# EAGLE board Board (EAGLE 9.7.0)
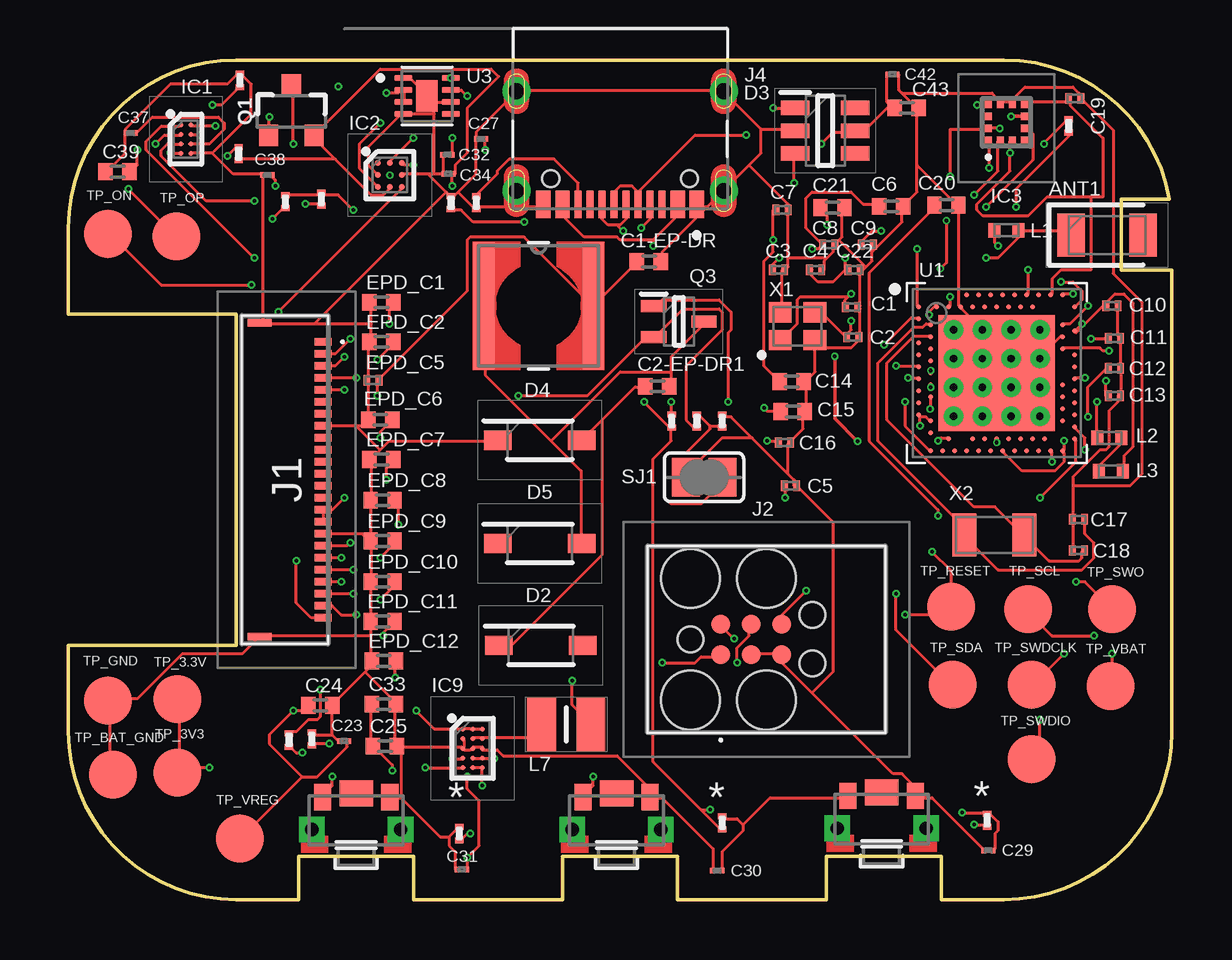
[diagram p0: board, top side]
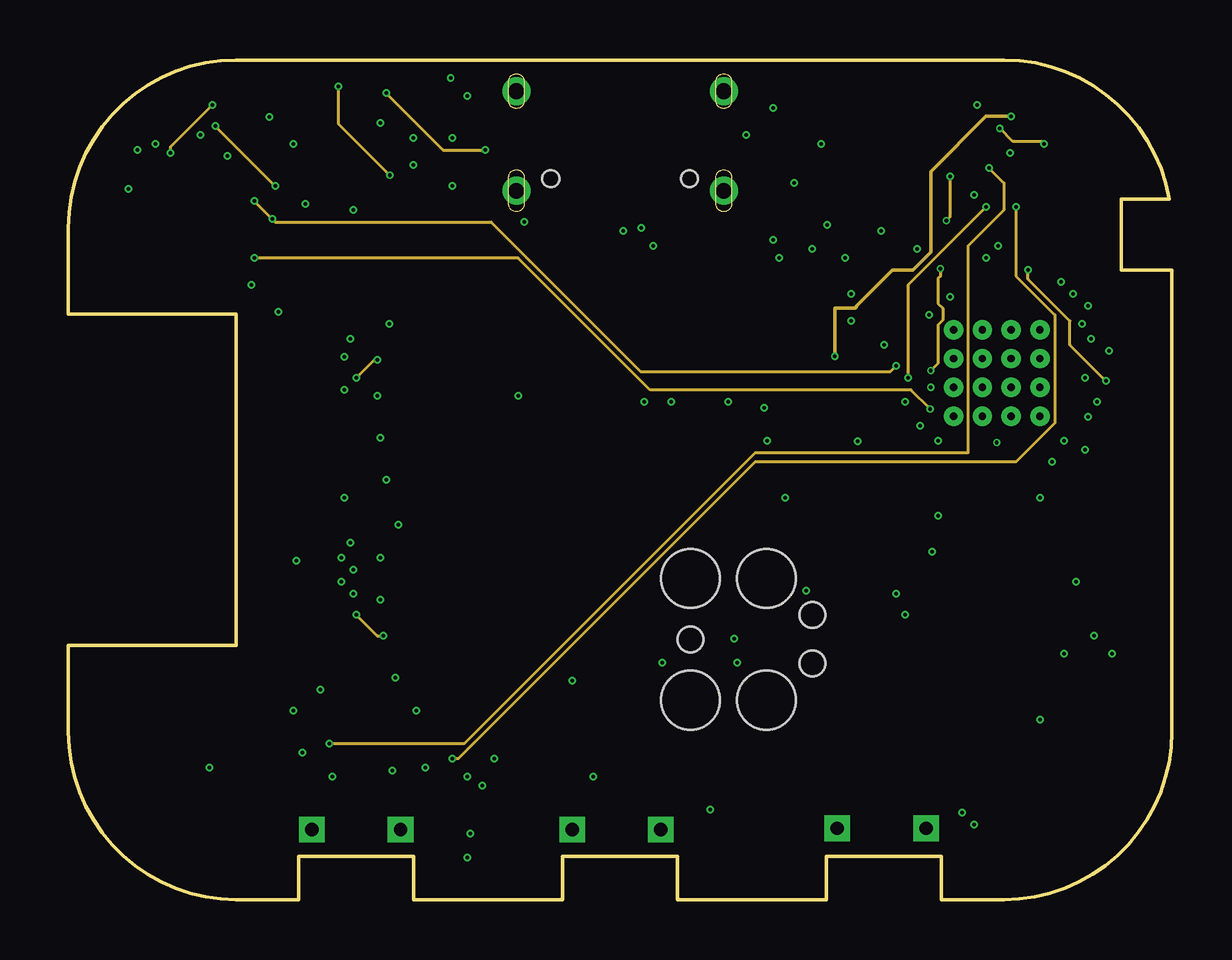
[diagram p1: board, inner layer Route2]
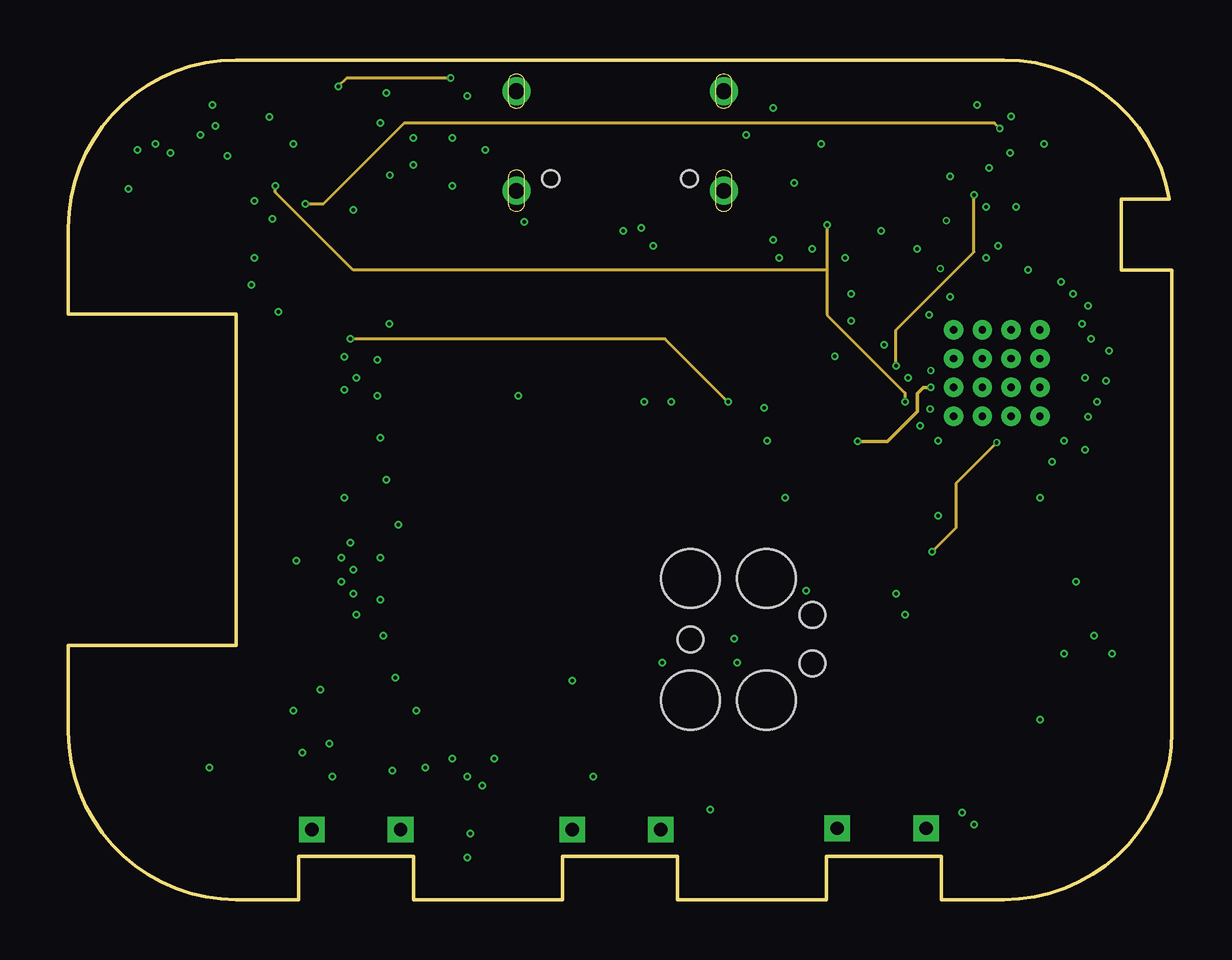
[diagram p2: board, inner layer Route15]
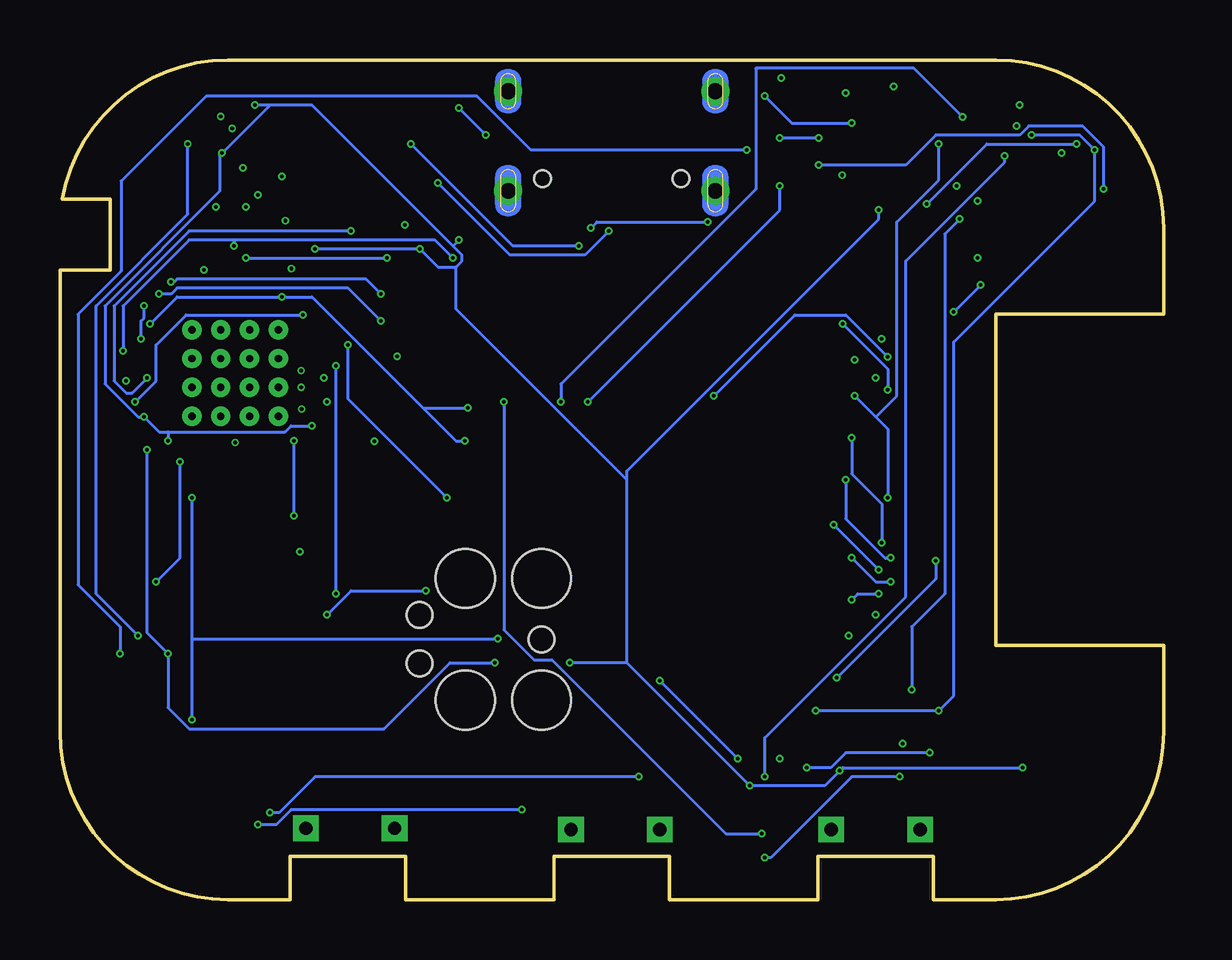
[diagram p3: board, bottom side, seen from below]

Size 46 x 35 mm. Coordinates in mm from the lower left corner, seen from the top.
Outline: 39,0 36.4,0 36.4,1.8 31.6,1.8 31.6,0 25.4,0 25.4,1.8 20.6,1.8 20.6,0 14.4,0 14.4,1.8 9.6,1.8 9.6,0 7,0 arc-90 0,7 0,10.6 7,10.6 7,24.4 0,24.4 0,28 arc-90 7,35 39,35 arc-80 45.9,29.2 43.9,29.2 43.9,26.25 46,26.25 46,7 arc-90 39,0
Copper layers (1+2*15+16): Top 0.035mm / dielectric 1.6mm / Route2 0.035mm / dielectric 0.15mm / Route15 0.035mm / dielectric 0.2mm / Bottom 0.035mm
Design rules "jlcpcb-2layers.dru *": minimum track width 5mil, minimum drill 0.15mm, track to track 5mil, track to pad 5mil, pad to pad 5mil, via to via 5mil, smd to smd 5mil, copper to edge 0.2mm, drill to drill 6mil, minimum pad ring 10mil, minimum via ring 3mil, stop-mask expansion 4mil, vias tented up to drill 999mm, thermal gap 10mil

## Footprints (pad centres in the part's own frame; a part is rotated, then mirrored left to right if it is on the bottom)
2450AT18B100E_ANTC3216X140N = smd 1.15 x 1.8: 1 -1.5,0; 2 1.5,0
NORDIC_NRF_3_RESC0201_L = smd 0.28 x 0.43: 1 -0.255,0; 2 0.255,0
PERFECT_0402_0402 = smd 0.6 x 0.7: 1 -0.5,0; 2 0.5,0
GRM011R60J152KE01L_2_CAPC0201X13N = smd 0.22 x 0.23: 1 -0.185,0; 2 0.185,0
ESP32_C6_LIBRARY_5_SOD3716X135N = smd 1.15 x 0.8: 1 -1.75,0; 2 1.75,0
ESP32_C6_LIBRARY_3_SOT95P280X145-6N = smd 1.2 x 0.6: 1 -1.25,0.95; 2 -1.25,0; 3 -1.25,-0.95; 4 1.25,-0.95; 5 1.25,0; 6 1.25,0.95
BQ25180YBGR_BGA8C40P2X4_100X155X50 = smd 0.2 x 0.2: A1 -0.2,0.6; A2 0.2,0.6; B1 -0.2,0.2; B2 0.2,0.2; C1 -0.2,-0.2; C2 0.2,-0.2; D1 -0.2,-0.6; D2 0.2,-0.6
DRV2605YZFR_BGA9C50P3X3_144X144X62 = smd 0.25 x 0.25: A1 -0.5,0.5; A2 0,0.5; A3 0.5,0.5; B1 -0.5,0; B2 0,0; B3 0.5,0; C1 -0.5,-0.5; C2 0,-0.5; C3 0.5,-0.5
BMA423_BMA423 = smd 0.3 x 0.35: 1 -0.75,-0.775; 2 -0.25,-0.775; 3 0.25,-0.775; 4 0.75,-0.775; 7 0.75,0.775; 8 0.25,0.775; 9 -0.25,0.775; 10 -0.75,0.775 | smd 0.35 x 0.3: 5 0.775,-0.25; 6 0.775,0.25; 11 -0.775,0.25; 12 -0.775,-0.25
RT6160AWSC_BGA15C40P3X5_140X230X60 = smd 0.216 x 0.216: A1 -0.4,0.8; A2 0,0.8; A3 0.4,0.8; B1 -0.4,0.4; B2 0,0.4; B3 0.4,0.4; C1 -0.4,0; C2 0,0; C3 0.4,0; D1 -0.4,-0.4; D2 0,-0.4; D3 0.4,-0.4; E1 -0.4,-0.8; E2 0,-0.8; E3 0.4,-0.8
503480-2400_5034802400 = smd 0.3 x 0.7: 1 -5.75,1.525; 2 -5.25,1.525; 3 -4.75,1.525; 4 -4.25,1.525; 5 -3.75,1.525; 6 -3.25,1.525; 7 -2.75,1.525; 8 -2.25,1.525; 9 -1.75,1.525; 10 -1.25,1.525; 11 -0.75,1.525; 12 -0.25,1.525; 13 0.25,1.525; 14 0.75,1.525; 15 1.25,1.525; 16 1.75,1.525; 17 2.25,1.525; 18 2.75,1.525; 19 3.25,1.525; 20 3.75,1.525; 21 4.25,1.525; 22 4.75,1.525; 23 5.25,1.525; 24 5.75,1.525 | smd 0.3 x 1: MP1 -6.54,-1.125; MP2 6.54,-1.125
TC2030-IDC_TC2030IDC = smd 0.783 x 0.783: 1 -0.953,-0.635; 2 -0.953,0.635; 3 0.317,-0.635; 4 0.317,0.635; 5 1.588,-0.635; 6 1.588,0.635 | hole 2.451: -2.223,-2.54; -2.223,2.54; 0.952,-2.54; 0.952,2.54 | hole 1.067: -2.223,0; 2.857,-1.016; 2.857,1.016
KH-TYPE-C-16P_KINGHELM_KH-TYPE-C-16P = smd 0.6 x 1.15: A1_B12 -3.2,4.725; A4_B9 -2.4,4.725; A9_B4 2.4,4.725; A12_B1 3.2,4.725 | smd 0.3 x 1.15: A5 -1.25,4.725; A6 -0.25,4.725; A7 0.25,4.725; A8 1.25,4.725; B5 1.75,4.725; B6 0.75,4.725; B7 -0.75,4.725; B8 -1.75,4.725 | drill 0.65 pad 1.05: SH1 -4.32,0; SH2 4.32,0; SH3 -4.32,4.15; SH4 4.32,4.15 | hole 0.7: -2.89,3.65; 2.89,3.65
NORDIC_NRF_2_RESC0402_L = smd 0.5 x 0.6: 1 -0.5,0; 2 0.5,0
ESP32_C6_LIBRARY_2_IND_4828-WE-TPC_WRE = smd 0.9 x 5.3: 1 -2.286,0; 2 2.286,0
MLP2016SR47MT0S1_INDC2016X100N = smd 1.2 x 2.2: 1 -1.028,0; 2 1.028,0
ESP32_C6_LIBRARY_4_ESP32_C6_LIBRARY_4_ESP32_C6_LIBRARY_4_ESP32_C6_LIBRARY_4_ESP32_WROVER_SPARKFUN-DISCRETESEMI_SOT23-3 = smd 0.8 x 0.9: 1 -0.95,-1; 2 0.95,-1; 3 0,1.1
ESP32_C6_LIBRARY_6_SOT65P210X110-3N = smd 1.05 x 0.5: 1 -1.05,0.65; 2 -1.05,-0.65; 3 1.05,0
CPF0201D7K68C1_0201 = smd 0.35 x 0.25: 1 0,0.275; 2 0,-0.275
ESP32_C6_LIBRARY_7_JUMPER_SJ = smd 1.168 x 1.6: 1 -0.762,0; 2 0.762,0
2025-10-22_07-23-44_LIBRARY_SW_EVP-AKE31A_PAN = smd 0.711 x 1.092: 1 -1.4,-0.972; 2 1.4,-0.972 | drill 0.559 pad 0.914 square: 3 -1.848,0.381; 4 1.848,0.381 | smd 1.397 x 1.092: 5 0,-1.124
HECTOR_WATCH_1_TP20R = smd 2 x 2: TP 0,0
NORDIC_NRF_4_AQFN50P700X700X85_HS-74N = smd 4.85 x 4.85: P$74 0,0 | drill 0.3 pad 0.6: P$75 -1.8,1.8; P$76 -0.6,1.8; P$77 0.6,1.8; P$78 1.8,1.8; P$79 -1.8,0.6; P$80 -0.6,0.6; P$81 0.6,0.6; P$82 1.8,0.6; P$83 -1.8,-0.6; P$84 -0.6,-0.6; P$85 0.6,-0.6; P$86 1.8,-0.6; P$87 -1.8,-1.8; P$88 -0.6,-1.8; P$89 0.6,-1.8; P$90 1.8,-1.8 | smd 0.2 x 0.2: P$A8 -1.25,3.25; P$A10 -0.75,3.25; P$A12 -0.25,3.25; P$A14 0.25,3.25; P$A16 0.75,3.25; P$A18 1.25,3.25; P$A20 1.75,3.25; P$A22 2.25,3.25; P$A23 2.75,3.25; P$AA24 3.25,-2.25; P$AB2 -2.75,-2.5; P$AC5 -2,-2.75; P$AC9 -1,-2.75; P$AC11 -0.5,-2.75; P$AC13 0,-2.75; P$AC15 0.5,-2.75; P$AC17 1,-2.75; P$AC19 1.5,-2.75; P$AC21 2,-2.75; P$AC24 3.25,-2.75; P$AD2 -2.75,-3.25; P$AD4 -2.25,-3.25; P$AD6 -1.75,-3.25; P$AD8 -1.25,-3.25; P$AD10 -0.75,-3.25; P$AD12 -0.25,-3.25; P$AD14 0.25,-3.25; P$AD16 0.75,-3.25; P$AD18 1.25,-3.25; P$AD20 1.75,-3.25; P$AD22 2.25,-3.25; P$AD23 2.75,-3.25; P$B1 -3.25,2.75; P$B3 -2.5,2.75; P$B5 -2,2.75; P$B7 -1.5,2.75; P$B9 -1,2.75; P$B11 -0.5,2.75; P$B13 0,2.75; P$B15 0.5,2.75; P$B17 1,2.75; P$B19 1.5,2.75; P$B24 3.25,2.75; P$C1 -3.25,2.25; P$D2 -2.75,2; P$D23 2.75,2; P$E24 3.25,1.75; P$F2 -2.75,1.5; P$F23 2.75,1.5; P$G1 -3.25,1.25; P$H2 -2.75,1; P$H23 2.75,1; P$J1 -3.25,0.75; P$J24 3.25,0.75; P$K2 -2.75,0.5; P$L1 -3.25,0.25; P$L24 3.25,0.25; P$M2 -2.75,0; P$N1 -3.25,-0.25; P$N24 3.25,-0.25; P$P2 -2.75,-0.5; P$P23 2.75,-0.5; P$R1 -3.25,-0.75; P$R24 3.25,-0.75; P$T2 -2.75,-1; P$T23 2.75,-1; P$U1 -3.25,-1.25; P$U24 3.25,-1.25; P$V23 2.75,-1.5; P$W1 -3.25,-1.75; P$W24 3.25,-1.75; P$Y2 -2.75,-2; P$Y23 2.75,-2
ESP32_C6_LIBRARY_SON50P200X200X80-9N = smd 0.76 x 0.27: 1 -0.985,0.75; 2 -0.985,0.25; 3 -0.985,-0.25; 4 -0.985,-0.75; 5 0.985,-0.75; 6 0.985,-0.25; 7 0.985,0.25; 8 0.985,0.75 | smd 0.9 x 1.3: 9 0,0
NORDIC_NRF_BT-XTAL_2016_N = smd 0.95 x 0.85: 1 -0.725,-0.575; 2 0.725,-0.575; 3 0.725,0.575; 4 -0.725,0.575
NORDIC_NRF_1_XTAL_3215_N = smd 1 x 1.8: 1 -1.25,0; 2 1.25,0

## Placement (x,y rotation side)
ANT1  2450AT18B100E  [2450AT18B100E_ANTC3216X140N]  43.3,27.7 0 top
C1  12pF  [NORDIC_NRF_3_RESC0201_L]  32.65,24.7 0 top
C1-EP-DR  10uF  [PERFECT_0402_0402]  24.2,26.6 0 top
C2  12pF  [NORDIC_NRF_3_RESC0201_L]  32.7,23.45 0 top
C2-EP-DR1  4.7uF/25V  [PERFECT_0402_0402]  24.55,21.4 0 top
C3  1pF  [NORDIC_NRF_3_RESC0201_L]  29.6,26.25 0 top
C4  1pF  [NORDIC_NRF_3_RESC0201_L]  31.15,26.25 0 top
C5  100nF  [NORDIC_NRF_3_RESC0201_L]  30.1,17.25 0 top
C6  4.7µF  [PERFECT_0402_0402]  34.3,28.9 0 top
C7  100nF  [NORDIC_NRF_3_RESC0201_L]  29.75,28.75 0 top
C8  100nF  [NORDIC_NRF_3_RESC0201_L]  31.7,27.3 0 top
C9  820pF  [NORDIC_NRF_3_RESC0201_L]  33.3,27.3 0 top
C10  N.C.  [NORDIC_NRF_3_RESC0201_L]  43.5,24.75 0 top
C11  100pF  [NORDIC_NRF_3_RESC0201_L]  43.6,23.4 0 top
C12  100nF  [NORDIC_NRF_3_RESC0201_L]  43.6,22.15 0 top
C13  N.C.  [NORDIC_NRF_3_RESC0201_L]  43.6,21 0 top
C14  4.7uF  [PERFECT_0402_0402]  30.15,21.6 0 top
C15  1.0µF  [PERFECT_0402_0402]  30.2,20.35 0 top
C16  47nF  [NORDIC_NRF_3_RESC0201_L]  29.85,19.05 0 top
C17  12pF  [NORDIC_NRF_3_RESC0201_L]  42.1,15.85 0 top
C18  12pF  [NORDIC_NRF_3_RESC0201_L]  42.1,14.55 0 top
C19  100nF  [NORDIC_NRF_3_RESC0201_L]  41.95,33.4 0 top
C20  4.7µF  [PERFECT_0402_0402]  36.6,28.95 0 top
C21  4.7µF  [PERFECT_0402_0402]  31.85,28.85 0 top
C22  N.C.  [NORDIC_NRF_3_RESC0201_L]  32.75,26.25 0 top
C23  0.1uF  [GRM011R60J152KE01L_2_CAPC0201X13N]  11.5,6.6 0 top
C24  10uF  [PERFECT_0402_0402]  10.5,8.1 0 top
C25  22uF  [PERFECT_0402_0402]  13.2,6.4 0 top
C27  0.1uF  [GRM011R60J152KE01L_2_CAPC0201X13N]  17.2,31.7 0 top
C29  1uF  [GRM011R60J152KE01L_2_CAPC0201X13N]  38.35,2.05 0 top
C30  1uF  [GRM011R60J152KE01L_2_CAPC0201X13N]  27.05,1.2 0 top
C31  1uF  [GRM011R60J152KE01L_2_CAPC0201X13N]  16.4,1.25 0 top
C32  1uF  [GRM011R60J152KE01L_2_CAPC0201X13N]  15.8,31.05 0 top
C33  22uF  [PERFECT_0402_0402]  13.15,8.15 0 top
C34  0.1uF  [GRM011R60J152KE01L_2_CAPC0201X13N]  15.85,30.25 0 top
C37  1uF  [GRM011R60J152KE01L_2_CAPC0201X13N]  2.6,31.95 0 top
C38  1uF  [GRM011R60J152KE01L_2_CAPC0201X13N]  8.3,30.2 0 top
C39  10uF  [PERFECT_0402_0402]  2.05,30.35 0 top
C42  0.1uF  [GRM011R60J152KE01L_2_CAPC0201X13N]  34.35,34.4 0 top
C43  4.7uF  [PERFECT_0402_0402]  34.95,33 0 top
D2  MBR0530  [ESP32_C6_LIBRARY_5_SOD3716X135N]  19.7,10.6 0 top
D3  USBLC6-2SC6Y  [ESP32_C6_LIBRARY_3_SOT95P280X145-6N]  31.55,32.05 0 top
D4  MBR0530  [ESP32_C6_LIBRARY_5_SOD3716X135N]  19.65,19.15 0 top
D5  MBR0530  [ESP32_C6_LIBRARY_5_SOD3716X135N]  19.65,14.85 0 top
EPD_C1  1uF/50V  [PERFECT_0402_0402]  13.05,24.9 0 top
EPD_C2  1uF/50V  [PERFECT_0402_0402]  13.05,23.25 0 top
EPD_C5  0.1uF/50V  [NORDIC_NRF_3_RESC0201_L]  12.7,21.65 0 top
EPD_C6  1uF/50V  [PERFECT_0402_0402]  13,20 0 top
EPD_C7  1uF/50V  [PERFECT_0402_0402]  13.05,18.35 0 top
EPD_C8  1uF/50V  [PERFECT_0402_0402]  13.1,16.65 0 top
EPD_C9  1uF/50V  [PERFECT_0402_0402]  13.1,14.95 0 top
EPD_C10  1uF/50V  [PERFECT_0402_0402]  13.1,13.25 0 top
EPD_C11  1uF/50V  [PERFECT_0402_0402]  13.1,11.6 0 top
EPD_C12  1uF/50V  [PERFECT_0402_0402]  13.15,9.95 0 top
IC1  BQ25180YBGR  [BQ25180YBGR_BGA8C40P2X4_100X155X50]  4.9,31.7 0 top
IC2  DRV2605YZFR  [DRV2605YZFR_BGA9C50P3X3_144X144X62]  13.4,30.2 0 top
IC3  BMA421  [BMA423_BMA423]  39.1,32.4 0 top
IC9  RT6160AWSC  [RT6160AWSC_BGA15C40P3X5_140X230X60]  16.85,6.3 0 top
J1  503480-2400  [503480-2400_5034802400]  9.1,17.5 270 top
J2  TC2030-IDC  [TC2030-IDC_TC2030IDC]  28.15,10.85 0 top
J4  KH-TYPE-C-16P  [KH-TYPE-C-16P_KINGHELM_KH-TYPE-C-16P]  23,33.7 180 top
L1  3.9nH  [NORDIC_NRF_2_RESC0402_L]  39.1,27.9 0 top
L2  10uH  [NORDIC_NRF_2_RESC0402_L]  43.4,19.25 0 top
L3  15nH  [NORDIC_NRF_2_RESC0402_L]  43.45,17.85 0 top
L5  68uH  [ESP32_C6_LIBRARY_2_IND_4828-WE-TPC_WRE]  19.6,24.75 0 top
L7  FTC252012SR47MBCA  [MLP2016SR47MT0S1_INDC2016X100N]  20.75,7.3 0 top
Q1  DMG2305UX-7 20V/4.2A/52mΩ/1.4W  [ESP32_C6_LIBRARY_4_ESP32_C6_LIBRARY_4_ESP32_C6_LIBRARY_4_ESP32_C6_LIBRARY_4_ESP32_WROVER_SPARKFUN-DISCRETESEMI_SOT23-3]  9.3,32.85 0 top
Q3  SI1308EDL-T1-GE3  [ESP32_C6_LIBRARY_6_SOT65P210X110-3N]  25.45,24.1 0 top
R1_EP_DR  0.47  [CPF0201D7K68C1_0201]  26.2,19.95 0 top
R1_USB  5K1  [CPF0201D7K68C1_0201]  15.95,29.05 0 top
R2  0  [CPF0201D7K68C1_0201]  9.2,6.65 0 top
R2_EP_DR  10K  [CPF0201D7K68C1_0201]  16.3,2.75 0 top
R2_PWR_EPD  10K  [CPF0201D7K68C1_0201]  25.15,19.95 0 top
R2_USB  5K1  [CPF0201D7K68C1_0201]  17,29.05 0 top
R3  0  [CPF0201D7K68C1_0201]  10.15,6.7 0 top
R4  0  [CPF0201D7K68C1_0201]  41.7,32.25 0 top
R5  10K  [CPF0201D7K68C1_0201]  27.25,3.2 0 top
R7  10K  [CPF0201D7K68C1_0201]  38.3,3.3 0 top
R8  10K  [CPF0201D7K68C1_0201]  7.1,31.1 0 top
R9  10k  [CPF0201D7K68C1_0201]  7.15,34.15 0 top
R17  3k3  [CPF0201D7K68C1_0201]  10.55,29.2 0 top
R18  3k3  [CPF0201D7K68C1_0201]  9.05,29.1 0 top
R_TYPE_SEL  2.2  [CPF0201D7K68C1_0201]  27.25,19.95 0 top
SJ1  [ESP32_C6_LIBRARY_7_JUMPER_SJ]  26.5,17.6 0 top
SW_DN  2025-10-22_07-23-44_LIBRARY_EVP-AKE31ASW_EVP-AKE31A_PAN  [2025-10-22_07-23-44_LIBRARY_SW_EVP-AKE31A_PAN]  22.85,3.3 180 top
SW_ENT  2025-10-22_07-23-44_LIBRARY_EVP-AKE31ASW_EVP-AKE31A_PAN  [2025-10-22_07-23-44_LIBRARY_SW_EVP-AKE31A_PAN]  12,3.3 180 top
SW_UP  2025-10-22_07-23-44_LIBRARY_EVP-AKE31ASW_EVP-AKE31A_PAN  [2025-10-22_07-23-44_LIBRARY_SW_EVP-AKE31A_PAN]  33.9,3.35 180 top
TP_3.3V  HECTOR_WATCH_1_TPTP20R  [HECTOR_WATCH_1_TP20R]  4.55,8.35 0 top
TP_3V3  HECTOR_WATCH_1_TPTP20R  [HECTOR_WATCH_1_TP20R]  4.55,5.3 0 top
TP_BAT_GND  HECTOR_WATCH_1_TPTP20R  [HECTOR_WATCH_1_TP20R]  1.85,5.2 0 top
TP_GND  HECTOR_WATCH_1_TPTP20R  [HECTOR_WATCH_1_TP20R]  1.65,8.3 0 top
TP_ON  HECTOR_WATCH_1_TPTP20R  [HECTOR_WATCH_1_TP20R]  1.65,27.75 0 top
TP_OP  HECTOR_WATCH_1_TPTP20R  [HECTOR_WATCH_1_TP20R]  4.5,27.65 0 top
TP_RESET  HECTOR_WATCH_1_TPTP20R  [HECTOR_WATCH_1_TP20R]  36.8,12.2 0 top
TP_SCL  HECTOR_WATCH_1_TPTP20R  [HECTOR_WATCH_1_TP20R]  40,12.1 0 top
TP_SDA  HECTOR_WATCH_1_TPTP20R  [HECTOR_WATCH_1_TP20R]  36.85,8.95 0 top
TP_SWDCLK  HECTOR_WATCH_1_TPTP20R  [HECTOR_WATCH_1_TP20R]  40.15,8.95 0 top
TP_SWDIO  HECTOR_WATCH_1_TPTP20R  [HECTOR_WATCH_1_TP20R]  40.15,5.85 0 top
TP_SWO  HECTOR_WATCH_1_TPTP20R  [HECTOR_WATCH_1_TP20R]  43.5,12.1 0 top
TP_VBAT  HECTOR_WATCH_1_TPTP20R  [HECTOR_WATCH_1_TP20R]  43.45,8.9 0 top
TP_VREG  HECTOR_WATCH_1_TPTP20R  [HECTOR_WATCH_1_TP20R]  7.15,2.55 0 top
U1  NRF52840_QF  [NORDIC_NRF_4_AQFN50P700X700X85_HS-74N]  38.7,21.95 0 top
U3  MAX17048G+T10  [ESP32_C6_LIBRARY_SON50P200X200X80-9N]  14.95,33.5 0 top
X1  32MHz  [NORDIC_NRF_BT-XTAL_2016_N]  30.4,23.9 0 top
X2  32.768kHz  [NORDIC_NRF_1_XTAL_3215_N]  38.6,15.2 0 top

## Library data of the parts
ANT1 = InkTime_v5; ARROW_PART_NUMBER: 2450AT18B100E; ARROW_PRICE-STOCK: https://www.arrow.com/en/products/2450at18b100e/johanson-dielectrics?utm_currency=USD&region=nac; DESCRIPTION: Antennas 2.45GHz ANTENNA; HEIGHT: 1.4mm; MANUFACTURER_NAME: JOHANSON TECHNOLOGY; MANUFACTURER_PART_NUMBER: 2450AT18B100E; MOUSER_PART_NUMBER: 609-2450AT18B100E; MOUSER_PRICE-STOCK: https://www.mouser.co.uk/ProductDetail/Johanson-Technology/2450AT18B100E?qs=yCnrNFeXz%252Bh5MFsFIXGZGA%3D%3D
C1 C1-EP-DR C2 C2-EP-DR1 C3-C22 C24 C25 C33 C39 C43 EPD_C1 EPD_C2 EPD_C5-EPD_C12 L1-L3 R1_EP_DR R1_USB R2 R2_EP_DR R2_PWR_EPD R2_USB R3-R5 R7-R9 R17 R18 R_TYPE_SEL SJ1 TP_3.3V TP_3V3 TP_BAT_GND TP_GND TP_ON TP_OP TP_RESET TP_SCL TP_SDA TP_SWDCLK TP_SWDIO TP_SWO TP_VBAT TP_VREG U1 X1 X2 = InkTime_v5
C23 C27 C29-C32 C34 C37 C38 C42 = InkTime_v5; AVAILABILITY: In Stock; CHECK_PRICES: https://www.snapeda.com/parts/GRM011R60J152KE01L/Murata/view-part/?ref=eda; DESCRIPTION: SMD Capacitor X5R(EIA) with Capacitance: 1500pF Tol. 10%. Rated Voltage: 6.3Vdc; MF: Murata; MP: GRM011R60J152KE01L; PACKAGE: 0201 Murata; PRICE: None; SNAPEDA_LINK: https://www.snapeda.com/parts/GRM011R60J152KE01L/Murata/view-part/?ref=snap
D2 D4 D5 = InkTime_v5; AVAILABILITY: In Stock; CHECK_PRICES: https://www.snapeda.com/parts/MBR0530/Onsemi/view-part/?ref=eda; DESCRIPTION: Diode Schottky 30 V 500mA Surface Mount SOD-123; MF: ON Semiconductor; MP: MBR0530; PACKAGE: SOD-123-2 ON Semiconductor; PRICE: None; PURCHASE-URL: https://www.snapeda.com/api/url_track_click_mouser/?unipart_id=179458&manufacturer=ON Semiconductor&part_name=MBR0530&search_term=None; SNAPEDA_LINK: https://www.snapeda.com/parts/MBR0530/Onsemi/view-part/?ref=snap
D3 = InkTime_v5; AVAILABILITY: In Stock; CHECK_PRICES: https://www.snapeda.com/parts/USBLC6-2SC6Y/STMicroelectronics/view-part/?ref=eda; DESCRIPTION: 17V Clamp 5A (8/20µs) Ipp Tvs Diode Surface Mount SOT-23-6; MF: STMicroelectronics; MP: USBLC6-2SC6Y; PACKAGE: SOT-23-6 STMicroelectronics; PRICE: None; SNAPEDA_LINK: https://www.snapeda.com/parts/USBLC6-2SC6Y/STMicroelectronics/view-part/?ref=snap
IC1 = InkTime_v5; ARROW_PART_NUMBER: BQ25180YBGR; ARROW_PRICE-STOCK: https://www.arrow.com/en/products/bq25180ybgr/texas-instruments?utm_currency=USD&region=nac; DESCRIPTION: Charger IC Lithium Ion/Polymer, Lithium Iron Phosphate 8-DSBGA (1.6x1.1); HEIGHT: 0.5mm; MANUFACTURER_NAME: Texas Instruments; MANUFACTURER_PART_NUMBER: BQ25180YBGR; MOUSER_PART_NUMBER: 595-BQ25180YBGR; MOUSER_PRICE-STOCK: https://www.mouser.co.uk/ProductDetail/Texas-Instruments/BQ25180YBGR?qs=doiCPypUmgEWjAK%252BJAX6Tw%3D%3D
IC2 = InkTime_v5; ARROW_PART_NUMBER: DRV2605YZFR; ARROW_PRICE-STOCK: https://www.arrow.com/en/products/drv2605yzfr/texas-instruments?region=nac; DESCRIPTION: Haptic Driver for ERM/LRA with Built-In Library and Smart Loop Architecture; HEIGHT: 0.625mm; MANUFACTURER_NAME: Texas Instruments; MANUFACTURER_PART_NUMBER: DRV2605YZFR
IC3 = InkTime_v5; ARROW_PART_NUMBER: BMA423; ARROW_PRICE-STOCK: https://www.arrow.com/en/products/bma423/bosch; DESCRIPTION: Accelerometers Triaxial low-g 12bit Acceleration Sensor; HEIGHT: 1mm; MANUFACTURER_NAME: BOSCH; MANUFACTURER_PART_NUMBER: BMA423; MOUSER_PART_NUMBER: 262-BMA423; MOUSER_PRICE-STOCK: https://www.mouser.co.uk/ProductDetail/Bosch-Sensortec/BMA423?qs=HXFqYaX1Q2xC%252BSgeGoX3mg%3D%3D
IC9 = InkTime_v5; DESCRIPTION: Buck-Boost Regulator Positive Output Step-Up/Step-Down I2C DC-DC Controller IC 15-WL-CSP (BSC) (1.4x2.3); HEIGHT: 0.6mm; MANUFACTURER_NAME: RICHTEK; MANUFACTURER_PART_NUMBER: RT6160AWSC; MOUSER_PART_NUMBER: 835-RT6160AWSC; MOUSER_PRICE-STOCK: https://www.mouser.co.uk/ProductDetail/Richtek/RT6160AWSC?qs=amGC7iS6iy%2FLd9PSoixZXQ%3D%3D
J1 = InkTime_v5; DESCRIPTION: FFC & FPC Connectors 0.5mm FPC RA SMT Dual Contact 24Ckt; HEIGHT: 1.87mm; MANUFACTURER_NAME: Molex; MANUFACTURER_PART_NUMBER: 503480-2400; MOUSER_PART_NUMBER: 538-503480-2400; MOUSER_PRICE-STOCK: https://www.mouser.co.uk/ProductDetail/Molex/503480-2400?qs=OAhjpuo3Vu7efIoxFh9AOw%3D%3D
J2 = InkTime_v5; DESCRIPTION: CABLE ADAPTER 6 POS; HEIGHT: 19mm; MANUFACTURER_NAME: Tag Connect; MANUFACTURER_PART_NUMBER: TC2030-IDC
J4 = InkTime_v5; AVAILABILITY: Not in stock; CHECK_PRICES: https://www.snapeda.com/parts/KH-TYPE-C-16P/Kinghelm/view-part/?ref=eda; MF: kinghelm; MP: KH-TYPE-C-16P; PACKAGE: None; PRICE: None; SNAPEDA_LINK: https://www.snapeda.com/parts/KH-TYPE-C-16P/Kinghelm/view-part/?ref=snap
L5 = InkTime_v5; COPYRIGHT: Copyright (C) 2024 Ultra Librarian. All rights reserved.; MANUFACTURER_PART_NUMBER: 744043680; MFR_NAME: Wurth Electronics
L7 = InkTime_v5; DESCRIPTION: SMD / SMT Inductors (Coils), L=0.47?H, L x W x T :; HEIGHT: 1mm; JLCPCB: https://jlcpcb.com/partdetail/6763488-FTC252012SR47MBCA/C5832368; MANUFACTURER_NAME: TDK; MANUFACTURER_PART_NUMBER: FTC252012SR47MBCA
Q1 = InkTime_v5; PROD_ID: TRANS-14715
Q3 = InkTime_v5; AVAILABILITY: In Stock; CHECK_PRICES: https://www.snapeda.com/parts/SI1308EDL-T1-GE3/Vishay+Siliconix/view-part/?ref=eda; DESCRIPTION: Si1308EDL-T1-GE3 N-channel MOSFET Transistor, 1.5 A, 30 V, 3-Pin SC-70 | Siliconix / Vishay SI1308EDL-T1-GE3; MF: Vishay Siliconix; MP: SI1308EDL-T1-GE3; PACKAGE: SOT-323 Vishay Semiconductor; PRICE: None; PURCHASE-URL: https://www.snapeda.com/api/url_track_click_mouser/?unipart_id=274603&manufacturer=Vishay Siliconix&part_name=SI1308EDL-T1-GE3&search_term=None; SNAPEDA_LINK: https://www.snapeda.com/parts/SI1308EDL-T1-GE3/Vishay+Siliconix/view-part/?ref=snap
SW_DN SW_ENT SW_UP = InkTime_v5; COPYRIGHT: Copyright (C) 2025 Ultra Librarian. All rights reserved.; DIGI-KEY_PART_NUMBER_1: P123437TR-ND; DIGI-KEY_PART_NUMBER_2: P123437CT-ND; DIGI-KEY_PART_NUMBER_3: P123437DKR-ND; MANUFACTURER_NAME: Panasonic; MANUFACTURER_PART_NUMBER: EVP-AKE31A
U3 = InkTime_v5; AVAILABILITY: In Stock; CHECK_PRICES: https://www.snapeda.com/parts/MAX17048G+T10/Analog+Devices/view-part/?ref=eda; DESCRIPTION: 3µA 1-Cell/2-Cell Fuel Gauge with ModelGauge; MF: Analog Devices; MP: MAX17048G+T10; PACKAGE: TDFN-8 Maxim; PRICE: None; PURCHASE-URL: https://www.snapeda.com/api/url_track_click_mouser/?unipart_id=329239&manufacturer=Analog Devices&part_name=MAX17048G+T10&search_term=None; SNAPEDA_LINK: https://www.snapeda.com/parts/MAX17048G+T10/Analog+Devices/view-part/?ref=snap

## Nets
3V3/1.7D: C34.2 IC2.C2 Q1.2 R2_PWR_EPD.2 R5.2 R7.2 R8.2
3V3/2.4A: C6.1 C7.1 C8.1 C12.1 C14.1 C19.1 C25.1 C33.1 IC3.3 IC3.7 IC3.10 IC9.E2 IC9.E3 J2.1 R17.1 R18.1 TP_3.3V.TP TP_3V3.TP U1.P$A22 U1.P$AD14 U1.P$AD23 U1.P$B1 U1.P$W1 U1.P$Y2
ALERT/1.6C: U3.5
ALERT/2.5C: U1.P$J24
D+/1.5D: D3.4
D+/2.7D: U1.P$AD6
D-/1.5D: D3.6
D-/2.7D: U1.P$AD4
DN: D3.1 J4.A7 J4.B7
DP: D3.3 J4.A6 J4.B6
EPD_3V3: C1-EP-DR.1 EPD_C5.2 J1.15 J1.16 L5.2 Q1.3
EPD_BUSY/1.5D: J1.9
EPD_BUSY/2.2D: U1.P$AD12
EPD_CS/1.4C: J1.12
EPD_CS/2.2D: U1.P$K2
EPD_DC/1.5D: J1.11
EPD_DC/2.2D: U1.P$AD10
EPD_RST/1.5D: J1.10
EPD_RST/2.2D: U1.P$AC11
GDR: J1.2 Q3.1 R2_EP_DR.2
GND: C1-EP-DR.2 C1.2 C2.2 C3.2 C4.2 C5.2 C6.2 C7.2 C8.2 C9.2 C10.2 C11.2 C12.2 C13.2 C14.2 C15.2 C16.2 C17.1 C18.1 C19.2 C20.2 C21.2 C22.2 C23.1 C24.2 C25.2 C27.1 C29.1 C30.1 C31.1 C32.1 C33.2 C34.1 C37.1 C38.1 C39.1 C42.2 C43.2 D3.2 D4.1 EPD_C1.1 EPD_C2.1 EPD_C5.1 EPD_C6.1 EPD_C7.1 EPD_C8.1 EPD_C9.1 EPD_C10.1 EPD_C11.1 EPD_C12.1 IC1.D2 IC2.B1 IC2.B3 IC3.8 IC3.9 IC9.B1 IC9.C1 IC9.C2 IC9.C3 J1.8 J1.17 J1.MP1 J1.MP2 J2.3 J2.5 J4.A1_B12 J4.A12_B1 J4.SH1 J4.SH2 J4.SH3 J4.SH4 R1_USB.1 R2_EP_DR.1 R2_USB.2 R3.1 R9.1 R_TYPE_SEL.1 SJ1.1 SW_DN.1 SW_ENT.1 SW_UP.1 TP_BAT_GND.TP TP_GND.TP U1.P$74 U1.P$75 U1.P$76 U1.P$77 U1.P$78 U1.P$79 U1.P$80 U1.P$81 U1.P$82 U1.P$83 U1.P$84 U1.P$85 U1.P$86 U1.P$87 U1.P$88 U1.P$89 U1.P$90 U1.P$B7 U1.P$F23 U3.1 U3.4 U3.6 U3.9 X1.2 X1.4
HAPTIC_EN/1.4C: IC2.A1
HAPTIC_EN/2.6A: U1.P$U1
IMU_INT1: IC3.5 U1.P$N1
IMU_INT2: IC3.6 U1.P$P2
LX1: IC9.B2 IC9.B3 L7.1
LX2: IC9.D2 IC9.D3 L7.2
MOSI/1.5B: J1.14
MOSI/2.2D: U1.P$B13
N$1: C5.1 U1.P$C1
N$2: IC9.D1 R4.2
N$3: IC1.D1 R9.2
N$4: C20.1 U1.P$AC5
N$5: IC9.E1 R2.2
N$6: C17.2 U1.P$D2 X2.1
N$7: ANT1.1 C4.1 C22.1 L1.2
N$8: IC3.1 R3.2
N$9: C18.2 U1.P$F2 X2.2
N$10: C13.1 U1.P$A18
N$11: L2.1 U1.P$B3
N$12: L2.2 L3.1
N$14: C2-EP-DR1.1 D2.1 D4.2
N$15: C2-EP-DR1.2 D5.2 L5.1 Q3.3
N$16: EPD_C6.2 J1.18
N$17: EPD_C2.2 J1.4
N$18: C9.1 U1.P$N24
N$19: R1_EP_DR.1 R_TYPE_SEL.2 SJ1.2
N$21: C3.1 L1.1 U1.P$H23
N$22: EPD_C1.2 J1.5
N$23: C10.1 C15.1 C16.1 L3.2 U1.P$B5 U1.P$E24
N$24: C11.1 U1.P$D23
N$25: C1.1 U1.P$B24 X1.1
N$26: C2.1 U1.P$A23 X1.3
N$28: EPD_C7.2 J1.19
N$29: EPD_C8.2 J1.20
N$30: EPD_C9.2 J1.21
N$31: J4.B5 R2_USB.1
N$32: J4.A5 R1_USB.2
N$33: C32.2 IC2.A2
N$34: EPD_C10.2 J1.22
N$35: EPD_C11.2 J1.23
N$36: EPD_C12.2 J1.24
OUT+: IC2.A3 TP_OP.TP
OUT-: IC2.C3 TP_ON.TP
P0.04: U1.P$J1
P0.09: U1.P$L24
P0.13/1.5D: C30.2 R5.1 SW_UP.2
P0.13/2.6C: U1.P$AD8
P0.14/1.5D: C31.2 R8.1 SW_ENT.2
P0.14/2.7C: U1.P$AC9
P0.19: U1.P$AC15
P0.20: U1.P$AD16
P0.21: U1.P$AC17
P0.22: U1.P$AD18
P0.23: U1.P$AC19
P0.24: U1.P$AD20
P0.25: U1.P$AC21
P0.26: U1.P$G1
P0.27: U1.P$H2
P0.28: U1.P$B11
P0.29: U1.P$A10
P0.30: U1.P$B9
P0.31: U1.P$A8
P1.01/1.6C: Q1.1 R2_PWR_EPD.1
P1.01/2.4B: U1.P$Y23
P1.02/1.6C: C29.2 R7.1 SW_DN.2
P1.02/2.8C: U1.P$W24
P1.03: U1.P$V23
P1.04: U1.P$U24
P1.05: U1.P$T23
P1.06: U1.P$R24
P1.07: U1.P$P23
P1.09: U1.P$R1
P1.10: U1.P$A20
P1.11: U1.P$B19
P1.12: U1.P$B17
P1.13: U1.P$A16
P1.14: U1.P$B15
P1.15: U1.P$A14
PMIC_INT: IC1.A1 U1.P$T2
PREVGH: D5.1
PREVGL: D2.2
RESE: J1.3 Q3.2 R1_EP_DR.2
RESET: J2.6 TP_RESET.TP U1.P$AC13
SCK/1.5B: J1.13
SCK/2.2D: U1.P$A12
SCL/1.4C: IC2.C1 U3.7
SCL/2.4C: IC1.B1 IC3.12 R4.1 R17.2 TP_SCL.TP U1.P$M2
SDA/1.4C: IC2.B2 U3.8
SDA/2.4C: IC1.C1 IC3.2 R2.1 R18.2 TP_SDA.TP U1.P$L1
SWDCLK: J2.4 TP_SWDCLK.TP U1.P$AA24
SWDIO: J2.2 TP_SWDIO.TP U1.P$AC24
SWO: TP_SWO.TP U1.P$AD22
VBAT/1.2A: C27.2 TP_VBAT.TP U3.2 U3.3
VBAT/2.5C: C37.2 IC1.C2
VBUS/1.5D: C42.1 C43.1 D3.5 J4.A4_B9 J4.A9_B4
VBUS/2.6D: C21.1 C38.2 IC1.A2 U1.P$AD2
VREG: C23.2 C24.1 C39.2 IC1.B2 IC9.A1 IC9.A2 IC9.A3 TP_VREG.TP

## Tracks (layer width: path | path; a pad name or v marks a point on that pad's centre or on a via)
3V3/1.7D  (via drill 0.15)
  Top 0.127: 11.12,30.88 10.25,31.75 Q1.2 10.25,31.88 13,34.62 17.62,34.62 17.94,34.31 16.62,33 16.62,31.12 16.12,30.62 16.12,30.25 C34.2 16,30.25 v16,29.75 | 11.12,30.88 12.62,29.38 13.12,29.38 13.38,29.62 IC2.C2 | 11.12,30.88 7.12,30.88 R8.2 | 25.12,19.62 25.12,19.12 24.38,18.38 24.38,5.75 26.38,3.75 | 26.38,3.75 27.25,2.88 R5.2 | v37.75,3.12 38.25,3.12 R7.2 | 26.38,3.75 v26.75,3.75 | 25.12,19.62 v24,20.75 | 25.12,19.62 R2_PWR_EPD.2
  Bottom 0.127: v37.75,3.12 37,3.12 36.38,3.75 v26.75,3.75 | v16,29.75 16,28.75 v24,20.75
3V3/2.4A  (via drill 0.15)
  Top 0.127: 42.62,29.3 42.62,26.25 41.38,26.25 41,25.88 41,25.25 U1.P$A22 | 41.75,33.25 41.75,33.38 C19.1 41.75,33.25 | 41.75,33.25 41.75,33.12 43.12,31.75 43.12,29.3 42.62,29.3 | IC3.3 39.25,31.62 v39.25,31.12 39.25,30.38 37.88,29 37.88,28.75 38.12,28.5 40,28.5 40.8,29.3 42.62,29.3 | 41.75,33.25 39.88,33.25 IC3.7 | C14.1 29,22.25 29,26.62 29.38,27 v29.38,27.5 29.38,28.75 C7.1 | U1.P$AD14 39,18.62 39.75,17.88 41.12,17.88 41.5,18.25 41.5,18.62 U1.P$AD23 41.5,18.75 v41.5,19.12 | 35.5,20.12 35.75,20.12 35.88,20 U1.P$Y2 | v35.38,27.12 35.38,24.75 U1.P$B1 | v31,27.12 31.25,27.12 31.38,27.25 C8.1 31.38,27.38 30.75,28 30.75,29.25 31,29.5 32.62,29.5 33.12,29 33.75,29 C6.1 | v37.88,33.12 38.25,33.12 IC3.10 | v42.5,20.12 42.5,21.38 43.25,22.12 C12.1 | v35.5,19.75 35.5,20.12 | 35.5,20.12 U1.P$W1 | 4.62,5.5 4.62,8.25 TP_3.3V.TP | 4.62,5.5 4.62,5.38 TP_3V3.TP 4.62,5.5 | R18.1 10.5,29.38 R17.1 10.62,29.38 11.25,29.38 v11.88,28.75 | IC9.E2 IC9.E3 v17.25,4.75 | v13.5,5.38 13.5,5.62 12.75,6.38 C25.1 12.62,6.5 12.62,8.12 C33.1 | v24.75,9.88 26.12,9.88 26.38,10.12 27.12,10.12 J2.1 | v5.88,5.5 4.62,5.5
  Bottom 0.127: v35.38,27.12 v31,27.12 30.25,26.38 29.5,26.38 | 37.25,33.12 35.5,33.12 29.62,27.25 | 37.25,33.12 v37.88,33.12 | 29.62,27.25 29.25,26.88 29.25,26.62 29.5,26.38 | 37.25,33.12 v39.25,31.12 39.35,31.02 39.35,29.52 44.12,24.75 44.12,21.5 42.75,20.12 v42.5,20.12 41.88,19.5 41.5,19.5 | v35.5,19.75 36.38,19.75 36.62,19.5 41.5,19.5 | 41.5,19.5 v41.5,19.12 | 29.62,27.25 v29.38,27.5 | 22.38,9.88 v24.75,9.88 | 22.38,9.88 v17.25,4.75 14.12,4.75 v13.5,5.38 13.38,5.5 v5.88,5.5 | v11.88,28.75 11.88,28.38 22.38,17.88 22.38,17.5 | 22.38,9.88 22.38,17.5 | 29.5,26.38 29.5,24.62 22.38,17.5
DN  (via drill 0.15)
  Top 0.127: J4.A7 22.75,29.5 23,29.75 23.5,29.75 23.75,29.5 | 23.75,29.5 J4.B7 | v29.38,33 D3.1 | v28.25,31.88 26.12,31.88 23.75,29.5
  Bottom 0.127: v28.25,31.88 v29.38,33
DP  (via drill 0.15)
  Top 0.127: J4.B6 22.25,28.38 22.5,28.12 22.88,28.12 | 22.88,28.12 23,28.12 23.25,28.38 J4.A6 | v30.25,29.88 30.25,31 D3.3 | 22.88,28.12 v23.12,27.88
  Bottom 0.127: v30.25,29.88 27.25,26.88 24.12,26.88 v23.12,27.88
EPD_3V3  (via drill 0.15)
  Top 0.127: J1.16 J1.15 11,16.25 v11.5,16.75 | 21.88,24.75 19,27.62 16.75,27.62 16.62,27.5 16.62,25.38 13,21.75 EPD_C5.2 12.88,21.62 v12.88,21 | 21.88,24.75 23.62,26.5 C1-EP-DR.1 | 21.88,24.75 L5.2 | v9.38,31.5 9.38,33.88 Q1.3
  Bottom 0.127: v11.5,16.75 11.5,19.62 12,20.12 | v12.88,21 12,20.12 | v9.38,31.5 9.38,30 11.12,28.25 11.12,21 12,20.12
GDR  (via drill 0.15)
  Top 0.127: v16.75,2.75 16.62,2.75 16.38,2.5 R2_EP_DR.2 | v27.5,20.75 27.5,23.62 27.62,23.75 27.62,24.5 27.12,25 24.75,25 24.5,24.75 Q3.1 | J1.2 11.12,22.75 v11.75,23.38
  Route15 0.127: v11.75,23.38 24.88,23.38 v27.5,20.75
  Bottom 0.127: v16.75,2.75 18.25,2.75 25.5,10 26.25,10 27.5,11.25 v27.5,20.75
GND
  Top 0.127: J2.3 28.5,10.25 29.62,10.25 J2.5 29.75,10.12 29.75,9.88 31,8.62 | 35.75,4.25 35.38,4.25 SW_UP.1 | 35.75,4.25 36,4.25 38.12,2.12 C29.1 | 31,8.62 34.38,5.25 34.75,5.25 35.75,4.25 | 40.5,22.62 41.38,23.5 U1.P$F23 | 38.12,23.75 37.25,24.62 U1.P$B7 37.12,24.75 37.12,28.88 C20.2 37,29 35.38,30.62 | 38,20.12 37,20.12 U1.P$87 | 38,20.12 U1.P$88 | 38,20.12 U1.P$74 | U1.P$89 39.38,20.25 39.38,21.25 U1.P$74 | 38,21.38 37,21.38 U1.P$83 | 38,21.38 U1.P$84 | 38,21.38 U1.P$74 | U1.P$85 39.25,21.38 U1.P$74 | 40.5,21.25 U1.P$90 | 40.5,21.25 U1.P$86 | 40.5,21.25 U1.P$74 | 38,22.5 37,22.5 U1.P$79 | 38,22.5 U1.P$80 | 38,22.5 U1.P$74 | U1.P$81 39.38,22.5 39.38,22.25 U1.P$74 | 40.5,22.62 U1.P$82 | 40.5,22.62 U1.P$74 | U1.P$75 38,23.75 U1.P$74 | 38.12,23.75 U1.P$76 | 38.12,23.75 U1.P$74 | U1.P$77 U1.P$78 U1.P$74 | 31.12,23 31.12,22 30.75,21.62 C14.2 30.75,21.5 30.75,20.38 C15.2 30.62,20.25 30.62,19.62 30.12,19.12 C16.2 30,19 30,17.75 | 31.12,23 X1.2 | 30,17.75 30.25,17.5 30.25,17.25 C5.2 30.38,17.25 31.88,15.75 31.88,9.5 31,8.62 | 30,17.75 28.5,19.25 | 28.5,19.25 27.62,20.12 27.25,20.12 R_TYPE_SEL.1 | 28.5,19.25 27.25,19.25 26.38,18.38 26.38,18.25 25.75,17.62 SJ1.1 | 28.88,32.12 30.25,32.12 D3.2 | 28.88,32.12 27.38,33.62 J4.SH1 27.25,33.75 18.75,33.75 J4.SH2 18.62,33.62 17,32 17,31.75 C27.1 17,31.62 17,30.25 16.25,29.5 | 26.62,28.88 27.25,29.5 J4.SH3 27.38,29.62 28.38,30.62 | 26.62,28.88 24.75,27 24.75,26.62 C1-EP-DR.2 | 26.62,28.88 26.25,28.88 J4.A1_B12 | 28.88,32.12 28.88,31.12 28.38,30.62 | C18.1 41.88,14.62 41.88,15.75 C17.1 41.88,15.88 41.88,17.25 | C10.2 43.75,23.5 C11.2 43.88,23.38 43.88,22.25 C12.2 43.88,22.12 43.88,21 C13.2 43.75,21 43.75,20.75 43.38,20.38 43.38,18.88 43.25,18.75 43,18.75 41.88,17.62 41.88,17.25
  Top 0.127: X1.4 29.75,24.5 29.75,26.25 C3.2 29.88,26.25 30,26.38 30,26.75 | 30,26.75 C7.2 | 31.62,26.75 31.88,27 31.88,27.25 C8.2 32,27.38 32.12,27.5 | 31.62,26.75 31.5,26.62 31.5,26.25 C4.2 | 32.12,27.5 32.25,27.62 32.25,28.75 C21.2 | 39.25,33.25 38.88,33.25 IC3.9 38.75,33.25 38.75,33.38 38.5,33.62 34.75,33.62 | 39.25,33.25 39.88,33.88 41.88,33.88 42.12,33.62 42.12,33.5 C19.2 42.25,33.38 43.55,32.08 43.55,26.1 44.75,24.9 44.75,17.75 44.25,17.25 41.88,17.25 | 39.25,33.25 IC3.8 | 35.38,33 34.75,33.62 | 34.75,33.62 34.62,33.75 34.62,34.38 C42.2 | 33.5,27 33.5,26.62 33.25,26.38 | 33.5,27 33.5,27.25 C9.2 | 33.25,26.38 33.12,26.25 C22.2 33,24.75 C1.2 33,24.62 33,23.5 C2.2 33,23.38 32.62,23 31.12,23 | 33.5,27 34.75,28.25 34.75,28.88 C6.2 34.88,29 35.38,29.5 35.38,30.62 | 35.38,30.62 35.38,33 | 35.38,33 C43.2 | 33.25,26.38 32.12,27.5 | 31.62,26.75 30,26.75 | 28.38,30.62 30,29 C7.2 | C7.2 | 18.62,28.88 19.75,28.88 J4.A12_B1 | 18.62,28.88 17,28.88 | 18.62,28.88 18.62,29.5 J4.SH4 | IC2.B1 12.88,30.25 12.5,30.62 12.5,31.38 13.88,32.75 U3.4 15.25,32.75 | U3.1 14.25,34.25 15,33.5 | 15.25,33.25 U3.6 | 15,33.5 15.25,33.25 | 15,33.5 U3.9 15.25,33.25 | 15.62,30.25 15.62,31 C32.1 | 15.62,30.25 15.25,30.25 | 15.25,30.25 15,30.25 | 15,30.25 14,30.25 IC2.B3 | 15.62,30.25 C34.1 | 15,30.25 15.75,29.5 | 15.75,29.5 15.88,29.38 R1_USB.1 16,29.25 16.25,29.5 | 15.25,30.25 15.25,32.75 | 15.25,32.75 15.25,33.25 | 17,28.88 16.88,28.88 16.25,29.5 | 17,28.88 R2_USB.2 | C39.1 1.62,30.38 2.38,31.12 2.38,31.88 C37.1 2.38,32 2.38,32.12 4.25,34 6.62,34 7.12,34.5 R9.1 7.25,34.38 7.62,34 7.62,32.75 6,31.12 | 6,31.12 5.12,31.12 IC1.D2 | 6,31.12 6.88,30.25 8.12,30.25 C38.1 8.12,30.12 8.12,24
  Top 0.127: 13,18.75 12.62,18.38 EPD_C7.1 12.62,18.25 12.62,16.75 EPD_C8.1 12.62,16.62 12.62,15 EPD_C9.1 | 13,18.75 13.38,19.12 17.88,19.12 D4.1 | 12,19.75 12.25,19.75 EPD_C6.1 12.5,21.62 EPD_C5.1 12.5,21.75 12.5,23.25 EPD_C2.1 12.62,23.25 12.62,24 | 12,19.75 J1.8 | 12.62,24 12.62,24.88 EPD_C1.1 | 12.62,24 10.25,24 | 10.25,24 8.12,24 | 8.12,24 8,24 J1.MP1 8.12,24 | 12,19.75 13,18.75 | 10.25,24 15.75,29.5 | TP_BAT_GND.TP 1.75,5.25 1.75,8.25 TP_GND.TP 1.75,8.38 2.88,8.38 4.75,10.25 7.25,10.25 7.88,10.88 J1.MP2 8,11 12.62,11 | 15.88,2.62 15.88,2.25 16.12,2 16.12,1.25 C31.1 | 15.88,2.62 16.25,3 R2_EP_DR.1 | 15.88,2.62 15.5,2.62 13.88,4.25 | 13.88,4.25 13.5,4.25 SW_ENT.1 | C30.1 26.88,1.25 26.88,2.12 24.75,4.25 24.38,4.25 SW_DN.1 24.25,4.38 24.25,4.62 22.88,6 18.12,6 17.88,6.25 17.25,6.25 IC9.C3 17.25,6.38 16.88,6.38 IC9.C2 16.75,6.25 16.5,6.25 IC9.C1 | IC9.C1 16.5,6.38 16.5,6.62 IC9.B1 | 13.88,6.38 13.75,6.38 C25.2 | 13.88,6.38 16.38,6.38 IC9.C1 | C25.2 13.62,6.5 13.62,8.12 C33.2 13.62,8.25 12.38,9.5 | 12.62,13.25 12.62,14.88 EPD_C9.1 | J1.17 12.25,15.25 12.5,15 EPD_C9.1 | 11,6.88 11.25,6.62 C23.1 | 11,6.88 10.25,6.88 R3.1 | 11,6.88 C24.2 11,8.12 12.38,9.5 | 12.62,11 12.62,10 EPD_C12.1 12.75,9.88 12.38,9.5 | 12.62,11 12.62,11.5 EPD_C11.1 12.62,11.62 12.62,13.25 | 12.62,13.25 EPD_C10.1 | 13.88,6.38 13.88,4.25 | 13.88,6.38 C25.2
IMU_INT1  (via drill 0.15)
  Top 0.127: v35,21.75 35.38,21.75 U1.P$N1 | v38.25,28.88 40.2,30.82 40.2,31.93 39.88,32.25 IC3.5
  Route2 0.127: v35,21.75 35,25.62 v38.25,28.88
IMU_INT2  (via drill 0.15 pad 0.25)
  Top 0.127: v35.95,21.35 U1.P$P2
  Top 0.152: IC3.6 v39.3,32.65 | v31.95,22.65 31.95,20.05 v32.9,19.1
  Route2 0.152: v39.3,32.65 38.25,32.65 35.95,30.35 35.95,27 35.2,26.25 34.35,26.25 32.85,24.75 32.85,24.7 32.8,24.65 31.95,24.65 v31.95,22.65
  Route15 0.152: v32.9,19.1 34.15,19.1 35.4,20.35 35.4,21.1 35.65,21.35 v35.95,21.35
LX1
  Top 0.127: 17.25,6.75 16.88,6.75 IC9.B2 | 17.25,6.75 19.12,6.75 19.62,7.25 L7.1 | 17.25,6.75 IC9.B3
LX2  (via drill 0.15)
  Top 0.127: 17.25,5.88 16.88,5.88 IC9.D2 | v17.75,5.88 17.25,5.88 | v21,9.12 21,8.12 21.75,7.38 L7.2 | 17.25,5.88 IC9.D3
  Bottom 0.127: v21,9.12 v17.75,5.88
N$1  (via drill 0.15)
  Top 0.127: v34,23.12 35.12,24.25 35.38,24.25 U1.P$C1 | v29.88,16.75 29.88,17.25 C5.1
  Bottom 0.127: v34,23.12 34,20.88 v29.88,16.75
N$2  (via drill 0.15)
  Top 0.127: v16,5.88 16.38,5.88 IC9.D1 | v39.5,28.88 39.5,29.62 41.75,31.88 R4.2
  Route2 0.127: v16,5.88 16.25,5.88 28.62,18.25 39.5,18.25 41.12,19.88 41.12,24.38 39.5,26 v39.5,28.88
N$3  (via drill 0.15)
  Top 0.127: v4.25,31.12 4.62,31.12 IC1.D1 | v6,33.12 6.38,33.12 7.12,33.88 R9.2
  Route2 0.127: v4.25,31.12 4.25,31.38 v6,33.12
N$4  (via drill 0.15)
  Top 0.127: v36.25,19.12 36.38,19.25 36.62,19.25 U1.P$AC5 | v36.25,16 36.25,16.25 33.38,19.12 33.38,26.12 36.12,28.88 C20.1
  Bottom 0.127: v36.25,16 v36.25,19.12
N$5  (via drill 0.15)
  Top 0.127: v14.88,5.5 IC9.E1 | v9.75,6.12 9.5,6.12 9.25,6.38 R2.2
  Bottom 0.127: v14.88,5.5 13.88,5.5 13.25,6.12 v9.75,6.12
N$6
  Top 0.127: U1.P$D2 35.88,24 35.75,24 35.62,23.88 35.25,23.88 33.75,22.38 33.75,19.12 37.25,15.62 37.25,15.25 X2.1 37.38,15.12 38.75,13.75 42.25,13.75 42.75,14.25 42.75,14.88 42.38,15.25 42.38,15.75 C17.2
N$7  (via drill 0.15)
  Top 0.127: 32.38,26.25 31.88,25.75 31.25,25.75 31,26 31,26.25 C4.1 | 39.88,27.88 41.8,27.88 ANT1.1 | 39.88,27.88 39.62,27.88 L1.2 | v32.38,26.75 32.38,26.25 | v38.25,26.75 38.75,26.75 39.88,27.88 | 32.38,26.25 C22.1
  Bottom 0.127: v38.25,26.75 v32.38,26.75
N$8  (via drill 0.15)
  Top 0.127: v10.88,6.5 10.25,6.5 R3.2 | v38.38,30.5 38.38,31.62 IC3.1
  Route2 0.127: v10.88,6.5 16.5,6.5 28.62,18.62 37.5,18.62 37.5,27.25 39,28.75 39,29.88 v38.38,30.5
N$9
  Top 0.127: U1.P$F2 35.88,23.5 35.25,23.5 34.12,22.38 34.12,20 37.75,16.38 38.62,16.38 39.75,15.25 X2.2 39.88,15.12 40.88,14.12 42.12,14.12 42.25,14.25 42.25,14.5 C18.2
N$10  (via drill 0.15)
  Top 0.127: v40,26.25 40,25.25 U1.P$A18 | v43.25,21.62 43.25,21 C13.1
  Route2 0.127: v40,26.25 40,25.88 41.75,24.12 41.75,23.12 v43.25,21.62
N$11  (via drill 0.15)
  Top 0.127: v35.88,24.38 35.88,24.5 36.12,24.75 U1.P$B3 | v42.88,20.75 42.88,19.25 L2.1
  Bottom 0.127: v35.88,24.38 40.75,24.38 42,23.12 42,21.62 v42.88,20.75
N$12
  Top 0.127: L3.1 43,17.88 43,18.12 43.88,19 43.88,19.25 L2.2
N$14
  Top 0.127: D4.2 22.25,20 | 22.25,20 23.62,21.38 24,21.38 C2-EP-DR1.1 | 22.25,20 22.25,14.38 18.5,10.62 18,10.62 D2.1
N$15
  Top 0.127: 25.12,22 25.12,22.62 26.5,24 Q3.3 | 25.12,22 25.12,21.5 C2-EP-DR1.2 | 20.12,19.12 17.38,21.88 17.38,24.75 L5.1 | 20.12,19.12 21.38,17.88 21.38,14.88 D5.2 | 25.12,22 23,22 20.12,19.12
N$16  (via drill 0.15)
  Top 0.127: J1.18 11.62,14.75 v11.75,14.88 | v13,19.25 13,19.5 EPD_C6.2
  Bottom 0.127: v11.75,14.88 11.75,16.5 13,17.75 v13,19.25
N$17  (via drill 0.15)
  Top 0.127: v12,21.75 J1.4 | v12.88,22.5 13.62,23.25 EPD_C2.2
  Route2 0.127: v12,21.75 12.75,22.5 v12.88,22.5
N$18  (via drill 0.15)
  Top 0.127: v42.38,21.75 42,21.75 U1.P$N24 | v33.88,27.88 33.5,27.88 33,27.38 C9.1
  Bottom 0.127: v42.38,21.75 43,21.12 43.25,21.12 43.75,21.62 43.75,24.75 40.62,27.88 v33.88,27.88
N$19
  Top 0.127: 26.75,19.75 27.25,19.75 R_TYPE_SEL.2 | 26.75,19.75 26.25,20.25 R1_EP_DR.1 | 26.75,19.75 26.75,19.62 25.75,18.62 25,18.62 24.88,18.5 24.88,16.75 25.12,16.5 26.38,16.5 27.38,17.5 SJ1.2
N$21  (via drill 0.15)
  Top 0.127: v43.38,22.88 43.12,22.88 43,23 41.5,23 U1.P$H23 | v29.62,26.75 29.38,26.5 29.38,26.25 C3.1 | v38.75,27.25 38.62,27.38 38.62,27.88 L1.1
  Bottom 0.127: v43.38,22.88 43.38,24.75 40.62,27.5 38.75,27.5 | 38.75,27.5 30.38,27.5 v29.62,26.75 | 38.75,27.5 v38.75,27.25
N$22  (via drill 0.15)
  Top 0.127: v11.5,21.25 J1.5 | v13.38,24 13.38,24.75 13.5,24.88 EPD_C1.2
  Bottom 0.127: v11.5,21.25 11.5,22.12 v13.38,24
N$23  (via drill 0.15)
  Top 0.127: v36.75,25.12 36.75,24.75 U1.P$B5 | v42.25,24 U1.P$E24 42,23.62 43.12,24.75 | v29.12,19.12 29.5,19.12 C16.1 | 43.12,24.75 43.62,25.25 44,25.25 44.38,24.88 44.38,18.88 44,18.5 44,17.88 L3.2 | 43.12,24.75 C10.1 | v29,20.5 29.12,20.38 29.62,20.38 C15.1
  Bottom 0.127: v42.25,24 41.12,25.12 v36.75,25.12 35.5,25.12 30.88,20.5 | v29.12,19.12 29.5,19.12 30.88,20.5 | 30.88,20.5 v29,20.5
N$24  (via drill 0.15)
  Top 0.127: v42.5,24.75 41.75,24 41.5,24 U1.P$D23 | v42.62,23.38 43.25,23.38 C11.1
  Bottom 0.127: v42.5,24.75 42.5,24.25 42.62,24.12 v42.62,23.38
N$25  (via drill 0.15)
  Top 0.127: U1.P$B24 42.25,25 42.25,25.38 41.88,25.75 v41.38,25.75 | 32.5,25.12 32.38,25 32.38,24.75 C1.1 | 32.5,25.12 v32.62,25.25 | 32.5,25.12 30.5,25.12 30.38,25 30.38,24 29.75,23.38 X1.1
  Bottom 0.127: v41.38,25.75 41.25,25.75 41.12,25.88 33.25,25.88 v32.62,25.25
N$26  (via drill 0.15)
  Top 0.127: v41.88,25.25 41.5,25.25 U1.P$A23 | v32.62,24.12 32.62,23.75 32.38,23.5 | 32.38,23.5 31.5,24.38 31.12,24.38 X1.3 | 32.38,23.5 C2.1
  Bottom 0.127: v41.88,25.25 41.38,25.25 41.12,25.5 34,25.5 v32.62,24.12
N$28  (via drill 0.15)
  Top 0.127: v11.38,14.25 J1.19 | v13.25,17.5 13.25,18 13.5,18.25 EPD_C7.2
  Bottom 0.127: v11.38,14.25 11.62,14.25 13.25,15.88 v13.25,17.5
N$29  (via drill 0.15)
  Top 0.127: v11.88,13.75 J1.20 | v13.75,15.62 13.75,16.5 EPD_C8.2
  Bottom 0.127: v13.75,15.62 v11.88,13.75
N$30  (via drill 0.15)
  Top 0.127: v11.38,13.25 J1.21 | v13,14.25 13.62,14.88 EPD_C9.2
  Bottom 0.127: v11.38,13.25 12,13.25 v13,14.25
N$31
  Top 0.127: J4.B5 21.25,29.88 20.25,30.88 18.38,30.88 17.88,30.38 17.88,30.25 17,29.38 R2_USB.1
N$32  (via drill 0.15)
  Top 0.127: v19,28.25 16.88,28.25 16.38,28.75 16,28.75 R1_USB.2 | v23.88,28 24.25,28.38 J4.A5
  Bottom 0.127: v19,28.25 23.62,28.25 v23.88,28
N$33  (via drill 0.15)
  Top 0.127: v16,31.75 16,31.12 C32.2 | v14.38,31.75 13.38,30.75 IC2.A2
  Bottom 0.127: v14.38,31.75 v16,31.75
N$34  (via drill 0.15)
  Top 0.127: v11.88,12.75 J1.22 | v13,12.5 13.5,13 13.5,13.25 EPD_C10.2
  Bottom 0.127: v11.88,12.75 12.75,12.75 v13,12.5
N$35  (via drill 0.15)
  Top 0.127: EPD_C11.2 13.12,11.12 v13.12,11 | v12,11.88 11.38,11.88 11,12.25 J1.23
  Route2 0.127: v13.12,11 12.88,11 v12,11.88
N$36  (via drill 0.15)
  Top 0.127: v13.62,9.25 13.62,9.88 EPD_C12.2 | v9.5,14.12 9.5,12.38 10.12,11.75 J1.24
  Bottom 0.127: v13.62,9.25 9.5,13.38 v9.5,14.12
OUT+  (via drill 0.15)
  Top 0.127: v14.38,30.62 14,30.62 IC2.A3 | v2.5,29.62 4.5,27.62 TP_OP.TP
  Bottom 0.127: v14.38,30.62 10.75,30.62 9.5,31.88 6,31.88 5.62,32.25 3.38,32.25 2.5,31.38 v2.5,29.62
OUT-  (via drill 0.15)
  Top 0.127: v8.75,24.5 13.88,29.62 IC2.C3 | v7.62,25.62 3.88,25.62 1.75,27.75 TP_ON.TP
  Bottom 0.127: v7.62,25.62 v8.75,24.5
P0.13/1.5D
  Top 0.127: 28.12,3.12 28.12,2.88 27.25,2 27.25,1.25 C30.2 | 28.12,3.12 27.88,3.38 27.25,3.38 R5.1 | 28.12,3.12 29.25,4.25 32.38,4.25 SW_UP.2
P0.14/1.5D  (via drill 0.15)
  Top 0.127: v11,5.12 11,4.75 10.62,4.38 SW_ENT.2 | C31.2 16.62,1.25 v16.62,1.75 17.12,2.25 17.12,4.12 16.62,4.62 v16.62,5.12 | v6.62,31 7,31.38 R8.1
  Bottom 0.127: v16.62,1.75 16.38,1.75 13,5.12 v11,5.12 | v6.62,31 6.62,30.75 10.75,26.62 10.75,12.62 16.62,6.75 v16.62,5.12
P1.01/1.6C  (via drill 0.15)
  Top 0.127: v25.12,20.75 25.12,20.25 R2_PWR_EPD.1 | v8.38,32.62 8.38,31.88 Q1.1
  Bottom 0.127: v25.12,20.75 25.12,21.5 17,29.62 17,34.65 10.4,34.65 v8.38,32.62
P1.02/1.6C  (via drill 0.15)
  Top 0.127: C29.2 38.62,2.12 38.62,2.75 38.75,2.88 38.75,3.25 38.38,3.62 R7.1 38.25,3.62 v37.25,3.62 | v21.88,5.12 21.88,4.75 21.5,4.38 SW_DN.2
  Bottom 0.127: v37.25,3.62 36.88,3.62 35.38,5.12 v21.88,5.12
PMIC_INT  (via drill 0.15)
  Top 0.127: v7.75,26.75 3.25,31.25 3.25,31.62 3.88,32.25 4.62,32.25 IC1.A1 | U1.P$T2 35.92,20.93 v35.92,20.45
  Route2 0.127: v7.75,26.75 18.75,26.75 24.25,21.25 35.12,21.25 v35.92,20.45
RESE  (via drill 0.15)
  Top 0.127: R1_EP_DR.2 26.12,19.75 26,19.75 25.75,20 25.75,22.25 27.25,23.75 27.25,24.5 27.12,24.62 25.62,24.62 24.5,23.5 Q3.2 24.38,23.38 24,23.38 21.62,21 v18.75,21 | J1.3 11.12,22.25 v11.5,22.62
  Bottom 0.127: v11.5,22.62 13.25,24.38 15.38,24.38 v18.75,21
RESET  (via drill 0.15, 0.15 pad 0.25)
  Top 0.127: v30.75,12.88 29.75,11.88 29.75,11.5 J2.6 | v34.88,11.88 36.5,11.88 36.75,12.12 TP_RESET.TP 36.8,13.7 v36,14.5 | v38.7,19.05 U1.P$AC13
  Route15 0.127: v36,14.5 37,15.5 37,17.35 v38.7,19.05
  Bottom 0.127: v30.75,12.88 33.88,12.88 v34.88,11.88
SCL/1.4C  (via drill 0.15)
  Top 0.127: v13,32.38 12.12,31.5 12.12,30.5 12.88,29.75 IC2.C1 | v16.62,33.5 16.38,33.75 U3.7
  Bottom 0.127: v13,32.38 15.5,32.38 v16.62,33.5
SCL/2.4C  (via drill 0.15, 0.15 pad 0.25)
  Top 0.127: v3.62,31.5 4,31.88 4.62,31.88 IC1.B1 | v9.88,29 10.5,29 R17.2 | v38.83,32.15 IC3.12 38.27,32.1 36.75,32.1 v36.75,30.15 | v40.67,31.5 40.67,31.55 41.62,32.5 R4.1 | v42.75,11 41,11 40,12 TP_SCL.TP | v36.6,28.3 36.6,26.55 v36.35,26.3 | v35.95,22.05 U1.P$M2
  Route2 0.127: v40.67,31.5 40.58,31.6 39.38,31.6 v38.83,32.15 | v36.75,30.15 36.75,28.45 v36.6,28.3 | v36.35,26.3 36.35,26 36.25,25.9 36.25,24.85 36.45,24.65 36.45,24.15 36.25,23.95 36.25,22.35 v35.95,22.05
  Route15 0.127: v9.88,29 10.62,29 14,32.38 38.6,32.38 v38.83,32.15
  Bottom 0.127: v3.62,31.5 7.38,31.5 v9.88,29 | v40.67,31.5 40.67,28.57 44.5,24.75 44.5,12.75 v42.75,11
SDA/1.4C  (via drill 0.15 pad 0.25)
  Route2 0.127: v11.25,33.9 11.25,32.35 IC2.B2
  Route15 0.127: U3.8 11.6,34.25 v11.25,33.9
  other vias: 15.93,34.25 13.4,30.2
SDA/2.4C  (via drill 0.15)
  Top 0.127: v34.5,22.25 35.38,22.25 U1.P$L1 | v34.5,12.75 34.5,11.25 36.75,9 TP_SDA.TP | v37.75,29.38 38.75,30.38 38.75,31.62 IC3.2 | IC1.C1 4.12,31.5 3.88,31.25 3.88,31 5.75,29.12 v7.75,29.12 | v8.5,28.38 9,28.88 R18.2 | v10.5,8.75 10.5,7.62 10.38,7.5 10,7.5 9.5,7 9.25,7 R2.1
  Route2 0.127: v7.75,29.12 v8.5,28.38 8.62,28.25 17.62,28.25 23.88,22 34.25,22 v34.5,22.25
  Route15 0.127: v37.75,29.38 37.75,27 34.5,23.75 v34.5,22.25
  Bottom 0.127: v34.5,12.75 v34.5,22.25 | v10.5,8.75 10.5,11.38 9.12,12.75 9.12,27.75 v8.5,28.38
SWDCLK  (via drill 0.15)
  Top 0.127: v42.38,18.75 42.38,19.25 42,19.62 U1.P$AA24 | v41.5,10.25 40.25,9 TP_SWDCLK.TP | v27.88,9.88 27.88,10.5 28.38,11 28.38,11.38 J2.4
  Bottom 0.127: v42.38,18.75 42.38,11.12 v41.5,10.25 41.5,8 40.62,7.12 32.5,7.12 29.75,9.88 v27.88,9.88
SWDIO  (via drill 0.15)
  Top 0.127: v40.5,16.75 42,18.25 42,19.12 U1.P$AC24 | v40.5,7.5 40.5,6.12 40.25,5.88 TP_SWDIO.TP | v27.75,10.88 27.25,11.38 J2.2
  Bottom 0.127: v40.5,7.5 40.5,10.88 | 40.5,10.88 v40.5,16.75 | 40.5,10.88 v27.75,10.88
SWO  (via drill 0.15)
  Top 0.127: v41,18.25 41,18.62 U1.P$AD22 | v42,13.25 42.38,13.25 43.5,12.12 TP_SWO.TP
  Bottom 0.127: v41,18.25 41,14.25 v42,13.25
VBAT/1.2A  (via drill 0.15)
  Top 0.127: v17.38,31.25 17.38,31.62 C27.2 | v13.25,33.62 13.75,33.62 13.88,33.75 U3.2 14,33.75 14,33.25 U3.3 | v43.5,10.25 43.5,9 TP_VBAT.TP
  Route2 0.127: v17.38,31.25 15.62,31.25 v13.25,33.62
  Bottom 0.127: v43.5,10.25 43.5,11.38 45.25,13.12 45.25,24.4 43.45,26.2 43.45,29.95 39.9,33.5 28.62,33.5 26.38,31.25 v17.38,31.25
VBAT/2.5C
  Top 0.127: IC1.C2 5.88,31.5 6.5,32.12 6.5,32.38 6.25,32.62 3.5,32.62 2.88,32 C37.2
VBUS/1.5D  (via drill 0.15)
  Top 0.127: 34.25,33.12 34.38,33 C43.1 34.25,33.12 | 34.25,33.12 34.12,33.25 34.12,34.38 C42.1 | 34.25,33.12 33.25,32.12 32.88,32.12 D3.5 32.75,32 31.88,32 v31.38,31.5 | 24.38,27.5 23,27.5 22.88,27.62 21.5,27.62 20.62,28.5 20.62,28.88 J4.A9_B4 | 24.38,27.5 25.38,28.5 25.38,28.88 J4.A4_B9 | 24.38,27.5 v24.38,27.25
  Bottom 0.127: v31.38,31.5 27.12,27.25 v24.38,27.25
VBUS/2.6D  (via drill 0.15)
  Top 0.127: v6.12,32.25 5.12,32.25 IC1.A2 | v8.62,29.75 8.62,30 8.5,30.12 C38.2 | v34.88,20.75 34.88,19.75 35.88,18.75 U1.P$AD2 | v31.62,28.12 31.62,28.5 31.38,28.75 C21.1
  Route2 0.127: v8.62,29.75 v6.12,32.25
  Route15 0.127: v34.88,20.75 34.88,21.12 31.62,24.38 31.62,26.25 | v31.62,28.12 31.62,26.25 | v8.62,29.75 8.62,29.5 11.88,26.25 31.62,26.25
VREG  (via drill 0.15)
  Top 0.127: 9.75,5.12 10.38,5.12 11.62,6.38 11.62,6.5 C23.2 | 9.75,5.12 7.25,2.62 TP_VREG.TP | v5.5,31.88 5.12,31.88 IC1.B2 | v2.88,31.25 2.88,30.62 2.62,30.38 C39.2 | IC9.A3 17.25,7.12 16.88,7.12 IC9.A2 16.75,7.12 16.5,7.12 IC9.A1 16.38,7.12 15.25,7.12 v14.5,7.88 | C24.1 10,8 9.88,7.88 v9.38,7.88 8.38,6.88 8.38,6.5 9.75,5.12
  Bottom 0.127: v5.5,31.88 3.5,31.88 v2.88,31.25 2.88,29.12 8.75,23.25 8.75,8.5 v9.38,7.88 v14.5,7.88